# Altium PCB Mini51.PcbDoc
Units mil, origin at the board's own origin, x right, y up, seen from the top; angles counter-clockwise.
Board outline 7485.03 x 4388.03 mil, 2 copper layers (Top Layer, Bottom Layer); 25 components, 41 nets, 141 pads, 0 vias.
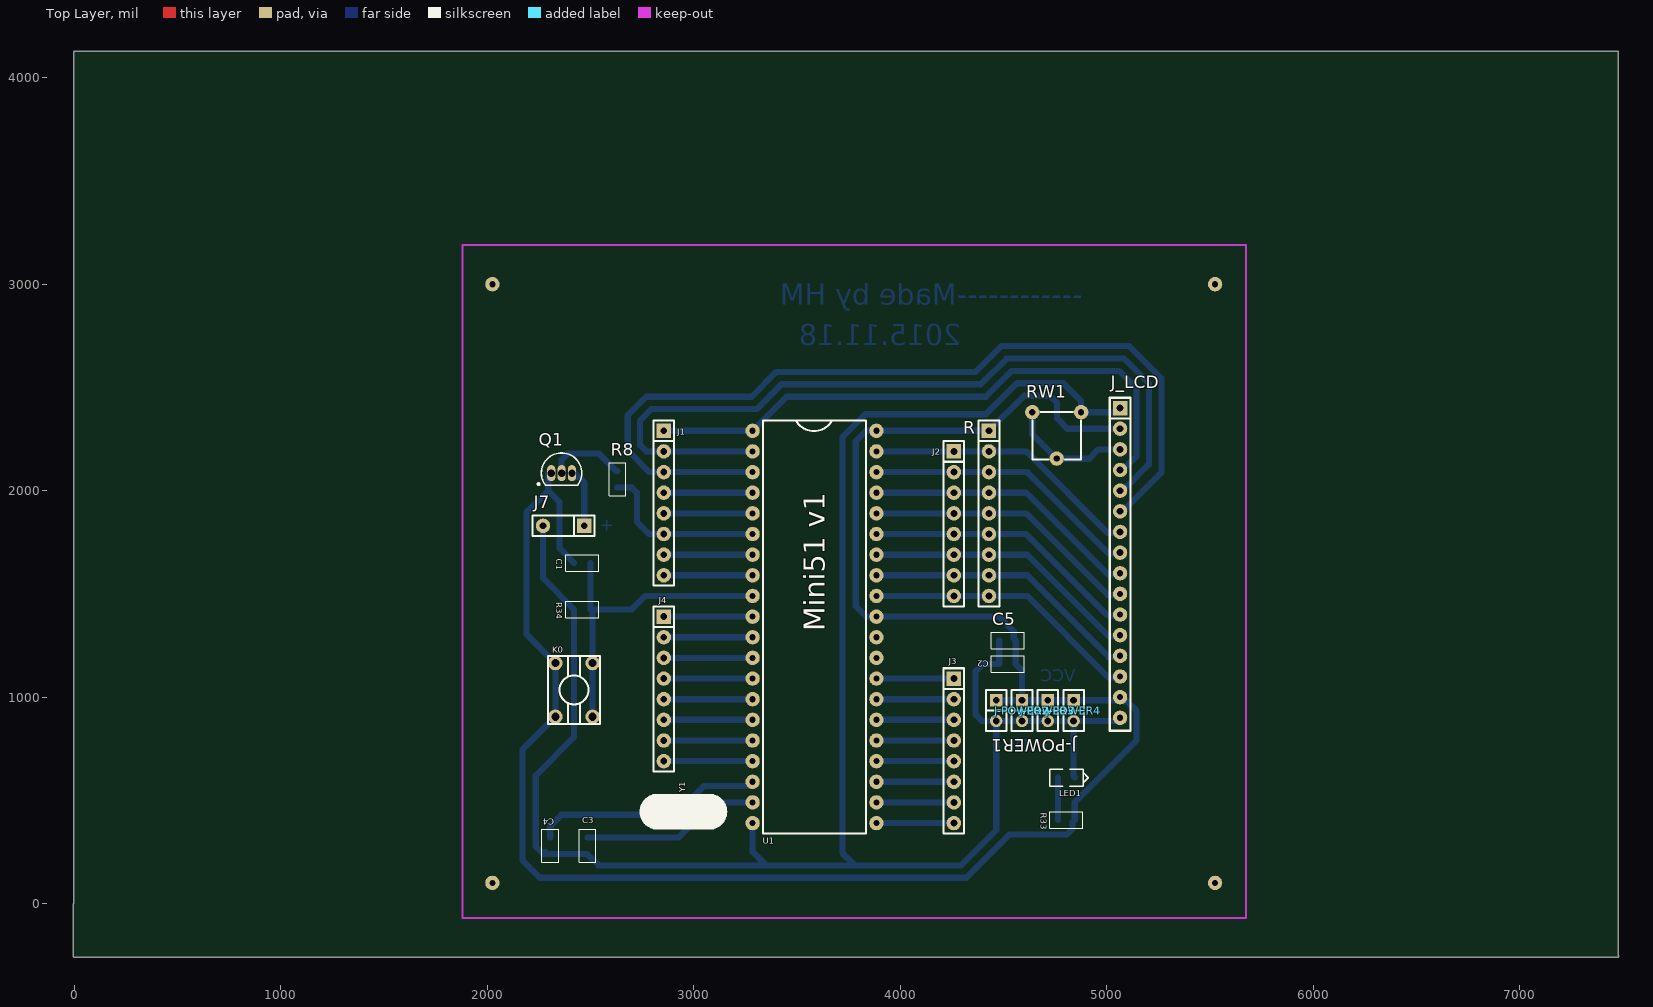
[diagram p0: Top Layer view]
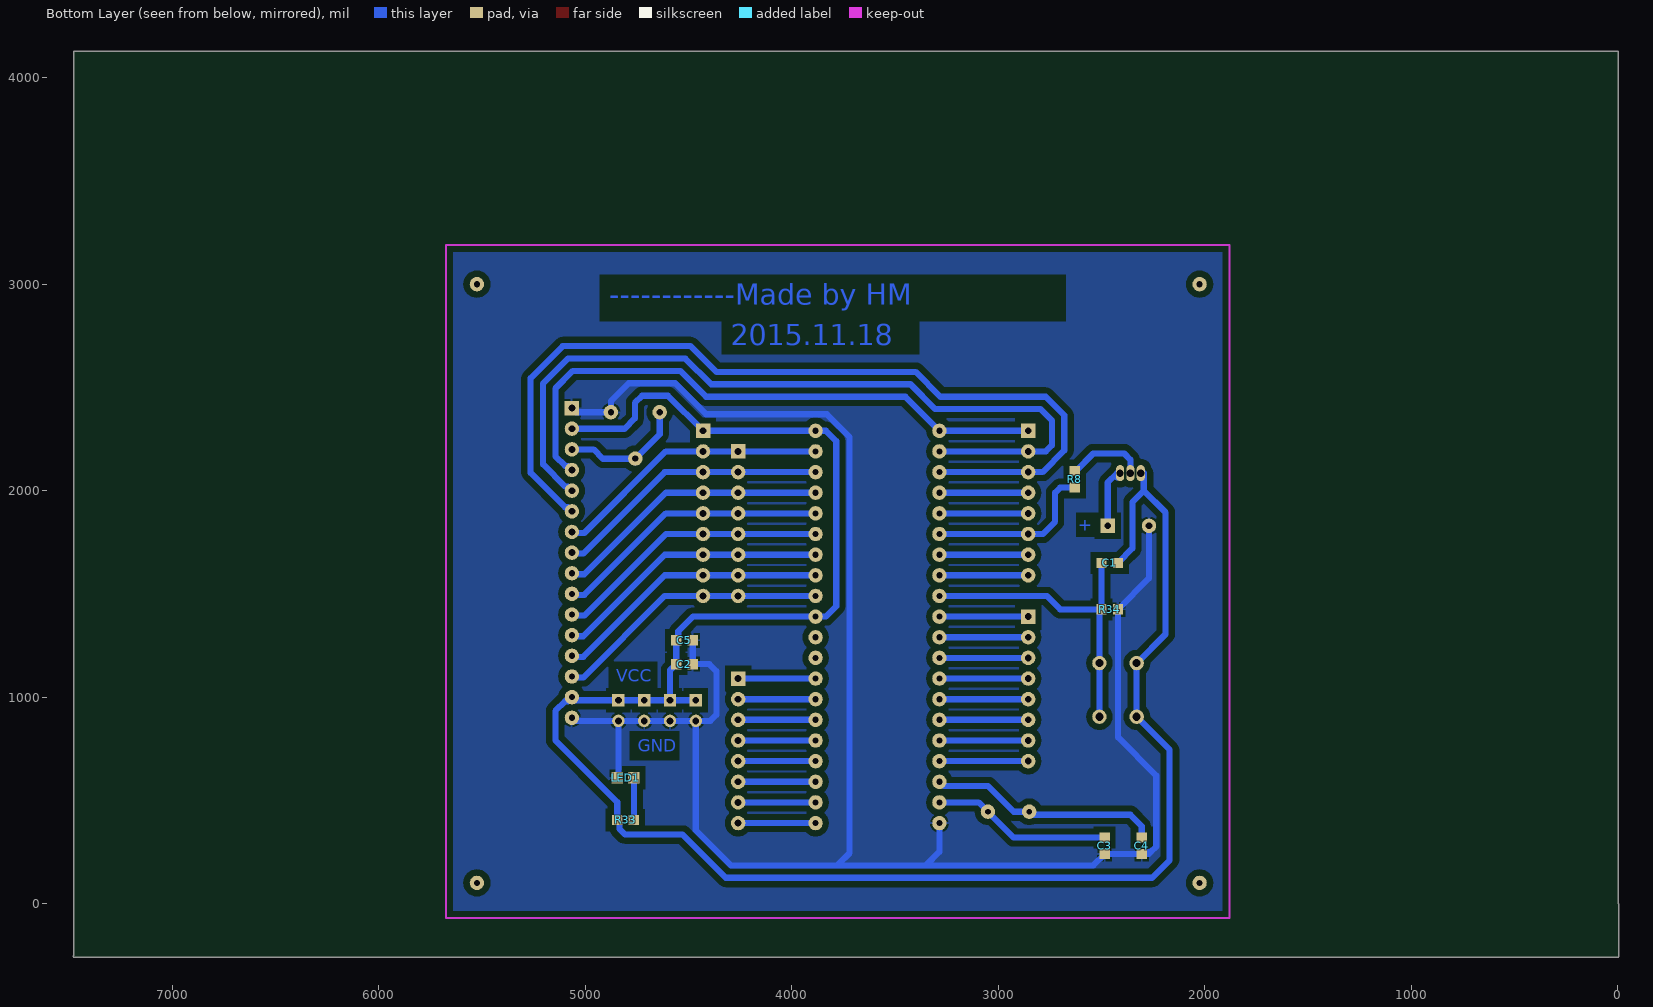
[diagram p1: Bottom Layer view, seen from below]

## Layer stack, top to bottom
Top Solder: solder mask 0.4, Solder Resist, Dk 3.5
Top Layer: signal copper 1.4
Dielectric1: dielectric 12.6, FR-4, Dk 4.8
Bottom Layer: signal copper 1.4
Bottom Solder: solder mask 0.4, Solder Resist, Dk 3.5

## Board outline
-5.02,-255 -5.02,-3.26 cw(c0,-3.26) -3.02,0.74 -3.02,4125 cw(c0,4125) 0,4128.02 7475,4128.02 cw(c7475,4125) 7478.01,4125 7478.01,-250.99 cw(c7475,-255) 7480.01,-255 cw(c7475,-255) 7475,-260.01 0,-260.01 cw(c0,-255)

## Design rules (kind name [scope] priority, off if disabled: settings)
Clearance [All] p1: gap=30
PolygonConnect [All] p1: connectstyle=Relief reliefconductorwidth=10 reliefentries=4 polygonreliefangle="90 Angle" airgapwidth=10
RoutingVias [All] p1: holewidth=28 width=50 viastyle="Through Hole" minholewidth=28 minwidth=50 maxholewidth=28 maxwidth=50
SilkToSolderMaskClearance SilkscreenOverComponentPads [IsPad] p1: minsilkscreentomaskgap=10 clearancetoexposedcopper=TRUE
SolderMaskExpansion [All] p1: expansion=4
Width [All] p1: maxlimit=40 minlimit=30 preferedwidth=30
28 further rules are at their usual default settings.

## Components (designator, comment, footprint, x,y, rotation, side; value= is the part's Value field where it differs from the comment)
C1 "0.1uF" 0805 2500,1650 r180 top
C2 "0.1uF" 0805 4480,1160 r0 top
C3 "22pF" 0805 2485,240 r90 top
C4 "22pF" 0805 2305,240 r90 top
C5 "0.1uF" 0805 4480,1275 r0 top
J1 "CON8" SIP8 2855,2290 r270 top
J2 "CON8" SIP8 4260,2190 r270 top
J3 "CON8" SIP8 4260,1090 r270 top
J4 "CON8" SIP8 2855,1390 r270 top
J7 "SPK" SPK 2470,1830 r180 top
J-POWER1 "CON2" SIP2 4465,985 r270 top
J-POWER2 "CON2" SIP2 4590,985 r270 top
J-POWER3 "CON2" SIP2 4715,985 r270 top
J-POWER4 "CON2" SIP2 4840,985 r270 top
J_LCD "CON16" SIP16 5065,2400 r270 top
K0 "KEY" KEY-6*6 2420,1035 r90 top
LED1 "LED" 0805LD 4765,610 r0 top
Q1 "2N3906" TO-92A 2360,2085 r270 top
R "CON8-RES" SIP8-RES 4430,2290 r270 top
R8 "5.1K" 0805 2630,2015 r90 top
R33 "1K" 0805 4765,405 r0 top
R34 "10K" 0805 2420,1425 r0 top
RW1 "RW" RW 4640,2380 r0 top
U1 "STC89C52RC" DIP40 3285,2290 r0 top
Y1 "CRYSTAL" XTAL-2 3050,445 r180 top

## Footprints (in the part's own frame and the unit in brackets; to place one, negate y for a bottom-side part, rotate by r counter-clockwise, add the part's x,y. Pads: shape width x height; smd on the part's side, far side on the other; paste and mask are expansions set on the pad)
0805 [mil]
  rect 50x50 smd far side: 1(0,0) 2(80,0)
  silkscreen extent -40,-40 120,40
0805LD [mil] "SMD LED, Imperial-0805, Metric-2012"
  rect 55x55 smd far side: A(0,0) K(80,0)
  silkscreen extent -41,-41 146,41
DIP40 [mil]
  round 70 hole 30: 1(0,0) 2(0,-100) 3(0,-200) 4(0,-300) 5(0,-400) 6(0,-500) 7(0,-600) 8(0,-700) 9(0,-800) 10(0,-900) 11(0,-1000) 12(0,-1100) 13(0,-1200) 14(0,-1300) 15(0,-1400) 16(0,-1500) 17(0,-1600) 18(0,-1700) 19(0,-1800) 20(0,-1900) 21(600,-1900) 22(600,-1800) 23(600,-1700) 24(600,-1600) 25(600,-1500) 26(600,-1400) 27(600,-1300) 28(600,-1200) 29(600,-1100) 30(600,-1000) 31(600,-900) 32(600,-800) 33(600,-700) 34(600,-600) 35(600,-500) 36(600,-400) 37(600,-300) 38(600,-200) 39(600,-100) 40(600,0)
  silkscreen extent 50,-1950 550,50
KEY-6*6 [mil]
  round 70 hole 40: 1(-130,-90) 1(130,-90) 2(-130,90) 2(130,90)
  silkscreen extent -165,-125 165,125
RW [mil]
  round 70 hole 30 mask+4: 1(0,0) 2(236.22,0) 3(118.11,-224.41)
  silkscreen extent 0,-228 236,0
SIP2 [mil]
  rect 60x60 hole 33: 1(0,0)
  round 60 hole 33: 2(100,0)
  silkscreen extent -50,-50 150,50
SIP8 [mil]
  rect 70x70 hole 33: 1(0,0)
  round 70 hole 33: 2(100,0) 3(200,0) 4(300,0) 5(400,0) 6(500,0) 7(600,0) 8(700,0)
  silkscreen extent -50,-50 750,50
SIP8-RES [mil]
  rect 70x70 hole 33: 1(0,0)
  round 70 hole 33: 2(100,0) 3(200,0) 4(300,0) 5(400,0) 6(500,0) 7(600,0) 8(700,0) 9(800,0)
  silkscreen extent -50,-50 850,50
SIP16 [mil]
  rect 70x70 hole 33: 1(0,0)
  round 70 hole 33: 2(100,0) 3(200,0) 4(300,0) 5(400,0) 6(500,0) 7(600,0) 8(700,0)
  round 70 hole 30: 9(800,0) 10(900,0) 11(1000,0) 12(1100,0) 13(1200,0) 14(1300,0) 15(1400,0) 16(1500,0)
  silkscreen extent -50,-50 1563,50
SPK [mil]
  rect 70x70 hole 33: 1(0,0)
  round 70 hole 33: 2(200,0)
  silkscreen extent -50,-50 250,50
TO-92A [mm] "TO, Flat Index; 3 In-Line, Axial Leads; Body Dia. 4.5mm; Leads 0.51 x 0.48 mm (max)"
  oval 2x1 hole 0.9: 1(0,-1.27) 2(0,0) 3(0,1.27)
  silkscreen extent -2.48,-2.95 1.5,2.48, body extent -2.5,-2.5 1.5,2.5, height 6.86
XTAL-2 [mil]
  round 70 hole 28: 1(0,0) 2(200,0)
  silkscreen extent -107,-80 307,80

## Part data
C1 C2 C3 C4 C5: library part CAP
J1 J2 J3 J4 R: "Connector 8p"
K0: "push-button"
LED1: "Light-Emitting Diode"
Q1: "PNP General Purpose Amplifier"
R8 R33 R34: library part RES
RW1: "10K"
U1: library part STC89C52
Y1: "Crystal"

## Free pads (board coordinates)
  round 70 hole 30: 31(2025,100) 32(2025,3000) 33(5525,3000) 34(5525,100)

## Nets (pads, with @x,y where several pads share a name; then routed paths per layer and width w, separated by ;. In a path a pad name is that pad's centre, name@x,y a point inside that pad or via, vN(x,y) a via of type N, cw(c..) or ccw(c..) an arc to the next point about the centre after c; other vN are vias at no path point)
GND: C2.1 C3.1 C4.1 C5.1 J7.2 J-POWER1.2 J-POWER2.2 J-POWER3.2 J-POWER4.2 J_LCD.1 J_LCD.16 LED1.K R34.1 RW1.2 U1.20 | length 9927.2
  Bottom Layer w30: J7.2 2270,1575 R34.1 2420,805 2235,620 2235,276.36 2261.36,250 2281.36,250 2271.36,240 C4.1 C3.1 2540,185 4295,185 4465,355 J-POWER1.2 ; U1.20 3285,250 3350,185 ; 3775,190 3720,245 3720,2259.85 3830.15,2370 4415,2370 4565,2520 4790,2520 4876.22,2433.78 RW1.2 J_LCD.1@5045,2380 ; C5.1 C2.1 4400,1160 4365,1125 4365,915 4395,885 J-POWER1.2 ; LED1.K 4840,615 J-POWER4.2 ; J_LCD.1@5060,2395 J_LCD.1@5045,2380 ; J_LCD.16 5050,885 J-POWER4.2 ; J_LCD.1 J_LCD.1@5045,2380 ; J-POWER1.2 J-POWER2.2 J-POWER3.2 J-POWER4.2
NetJ1_4: J1.4 U1.4 | length 430
  Bottom Layer w30: J1.4 3045,1990 U1.4
NetJ1_5: J1.5 U1.5 | length 430
  Bottom Layer w30: J1.5 U1.5
NetJ1_7: J1.7 U1.7 | length 430
  Bottom Layer w30: J1.7 U1.7
NetJ1_8: J1.8 U1.8 | length 430
  Bottom Layer w30: J1.8 U1.8
NetJ3_1: J3.1 U1.28 | length 375
  Bottom Layer w30: U1.28 J3.1
NetJ3_2: J3.2 U1.27 | length 375
  Bottom Layer w30: U1.27 J3.2
NetJ3_3: J3.3 U1.26 | length 375
  Bottom Layer w30: U1.26 J3.3
NetJ3_4: J3.4 U1.25 | length 375
  Bottom Layer w30: U1.25 J3.4
NetJ3_5: J3.5 U1.24 | length 375
  Bottom Layer w30: U1.24 J3.5
NetJ3_6: J3.6 U1.23 | length 375
  Bottom Layer w30: U1.23 J3.6
NetJ3_7: J3.7 U1.22 | length 375
  Bottom Layer w30: U1.22 J3.7
NetJ3_8: J3.8 U1.21 | length 375
  Bottom Layer w30: U1.21 J3.8
NetJ4_3: J4.3 U1.12 | length 430
  Bottom Layer w30: J4.3 U1.12
NetJ4_4: J4.4 U1.13 | length 430
  Bottom Layer w30: J4.4 U1.13
NetJ4_5: J4.5 U1.14 | length 430
  Bottom Layer w30: J4.5 U1.14
NetJ4_6: J4.6 U1.15 | length 430
  Bottom Layer w30: J4.6 U1.15
NetJ4_7: J4.7 U1.16 | length 430
  Bottom Layer w30: J4.7 U1.16
NetJ4_8: J4.8 U1.17 | length 430
  Bottom Layer w30: J4.8 U1.17
NetJ7_1: J7.1 Q1.3 | length 293.5
  Bottom Layer w30: Q1.3@2424.68,2065.32 2424.68,2085 2470,2039.68 J7.1
NetJ_LCD_3: J_LCD.3 RW1.1 RW1.3 | length 625.1
  Bottom Layer w30: RW1.1 4640,2273.7 RW1.3 4758.11,2136.89 4776.22,2155 4915,2155 4960,2200 J_LCD.3
NetLED1_A: LED1.A R33.1 | length 205
  Bottom Layer w30: R33.1 LED1.A
NetQ1_2: Q1.2 R8.2 | length 382.6
  Bottom Layer w30: Q1.2 2360,2150 2390,2180 2540,2180 2625,2095 R8.2
P0.0: J2.1 J_LCD.7 R.2 U1.39 | length 1338.6
  Bottom Layer w30: U1.39 J2.1 R.2 4610,2190 5005,1795 J_LCD.7@5060,1795
P0.1: J2.2 J_LCD.8 R.3 U1.38 | length 1338.6
  Bottom Layer w30: U1.38 J2.2 R.3 4615,2090 5010,1695 J_LCD.8@5060,1695
P0.2: J2.3 J_LCD.9 R.4 U1.37 | length 1338.6
  Bottom Layer w30: U1.37 J2.3 R.4 4610,1990 5005,1595 J_LCD.9@5060,1595
P0.3: J2.4 J_LCD.10 R.5 U1.36 | length 1338.6
  Bottom Layer w30: U1.36 J2.4 R.5 4610,1890 5005,1495 J_LCD.10@5060,1495
P0.4: J2.5 J_LCD.11 R.6 U1.35 | length 1338.6
  Bottom Layer w30: U1.35 J2.5 R.6 4610,1790 5005,1395 J_LCD.11@5060,1395
P0.5: J2.6 J_LCD.12 R.7 U1.34 | length 1338.6
  Bottom Layer w30: U1.34 J2.6 R.7 4615,1690 5010,1295 J_LCD.12@5060,1295
P0.6: J2.7 J_LCD.13 R.8 U1.33 | length 1338.6
  Bottom Layer w30: U1.33 J2.7 R.8 4615,1590 5010,1195 J_LCD.13@5060,1195
P0.7: J2.8 J_LCD.14 R.9 U1.32 | length 1338.6
  Bottom Layer w30: U1.32 J2.8 R.9 4615,1490 5010,1095 J_LCD.14@5060,1095
P1.0: J1.1 J_LCD.4 U1.1 | length 2851.1
  Bottom Layer w30: J1.1@2885,2290 U1.1 3450,2455 4415.15,2455 4540.15,2580 5059.85,2580 5145,2494.85 5145,2166.86 5098.14,2120 5085,2120 J_LCD.4
P1.1: J1.2 J_LCD.5 U1.2 | length 3871.9
  Bottom Layer w30: J1.2 2770,2190 2740,2220 2740,2340 2795,2395 3305.15,2395 3425.15,2515 4390.29,2515 4515.29,2640 5084.71,2640 5205,2519.71 5205,2126.86 5098.14,2020 5085,2020 J_LCD.5 ; J1.2@2885,2190 U1.2
P1.2: J1.3 J_LCD.6 U1.3 | length 4341.6
  Bottom Layer w30: U1.3 J1.3 2785.15,2090 2680,2195.15 2680,2364.85 2770.15,2455 3280.29,2455 3400.29,2575 4365.44,2575 4490.44,2700 5109.56,2700 5265,2544.56 5265,2086.86 5098.14,1920 5085,1920 J_LCD.6
P1.5: J1.6 R8.1 U1.6 | length 830.2
  Bottom Layer w30: R8.1 2700,2015 2725,1990 2725,1850 2785,1790 J1.6 U1.6
RST: C1.1 K0.1 R34.2 U1.9 | length 1561.1
  Bottom Layer w30: C1.1 R34.2 ; K0.1@2510,905 2510,1165 2510,1415 R34.2 ; U1.9 2765,1490 2700,1425 R34.2
RXD: J4.1 U1.10 | length 430
  Bottom Layer w30: J4.1 U1.10
TXD: J4.2 U1.11 | length 430
  Bottom Layer w30: J4.2 U1.11
VCC: C1.2 C2.2 C5.2 J-POWER1.1 J-POWER2.1 J-POWER3.1 J-POWER4.1 J_LCD.2 J_LCD.15 K0.2 Q1.1 R33.2 R.1 U1.31 U1.40 | length 10109.3
  Top Layer w30: U1.40 U1.40@3891.07,2290
  Bottom Layer w30: Q1.1@2295.32,2085 2295.32,1999.68 ; C1.2 2350,1720 2350,1945 2295.32,1999.68 ; J-POWER1.1 J-POWER2.1 ; J_LCD.2 4810,2300 4760,2350 4760,2425 4725,2460 4600,2460 R.1 U1.40 3835,2290 3785,2240 3785,1440 3835,1390 U1.31 4478.64,1390 4550,1318.64 4550,1285 C5.2 C2.2 4590,1130 J-POWER2.1 ; 2295.32,1999.68 2190,1894.37 2190,1305 2330,1165 2330,905 2170,745 2170,210 2255,125 4319.85,125 4529.85,335 4808.64,335 4835,361.36 4835,395 R33.2 4845,491.36 5145,791.36 5145,933.14 5098.14,980 5085,980 J_LCD.15 5050,985 J-POWER4.1 J-POWER3.1 J-POWER2.1
XTAL1: C3.2 U1.19 Y1.1 | length 870.4
  Bottom Layer w30: C3.2 2925,320 Y1.1 3095,490 U1.19
XTAL2: C4.2 U1.18 Y1.2 | length 1124.1
  Bottom Layer w30: C4.2 2305,375 2360,430 2835,430 Y1.2 2925,445 3050,570 3265,570 U1.18
pads on no net: U1.29 U1.30

## Polygon pours and split planes (outlines as drawn)
GND on Bottom Layer "GND" (solid, pour order 4): 1877.5,3199.27 5672.5,3199.27 5672.5,-55.73 1882.49,-55.73

## Keep-outs
Keep-Out Layer:
  lines w10: 1880,-70 1880,3190 5675,3190 5675,-70 1880,-70

## Other copper
Bottom Layer:
  text "------------Made by HM" at 4885,2900 h100
  text "2015.11.18" at 4295,2705 h100
  text "+" at 2545,1805 h60
  text "VCC" at 4850,1075 h60
  text "GND" at 4745,735 h60

## Silkscreen, mask and mechanical layers (free items; w line width, h text height)
Top Overlay:
  text "Mini51 v1" at 3635,1320 h100 r90
Mechanical 1:
  lines w6: 5675,-60 5675,3190